# Altium PCB FPGA Board V1.PcbDoc (part 2 of 3)
Units mil, origin at the board's own origin, x right, y up, seen from the top; angles counter-clockwise.
Board outline 3460 x 2420 mil, 8 copper layers (Layer 1, Layer 2, Layer 3, Layer 4, Layer 5, Layer 6, Layer 7, Layer 8), stack 40.159 mil thick; 81 components, 311 nets, 1100 pads, 152 vias.
Unrouted connection lines stored in the file: 594.
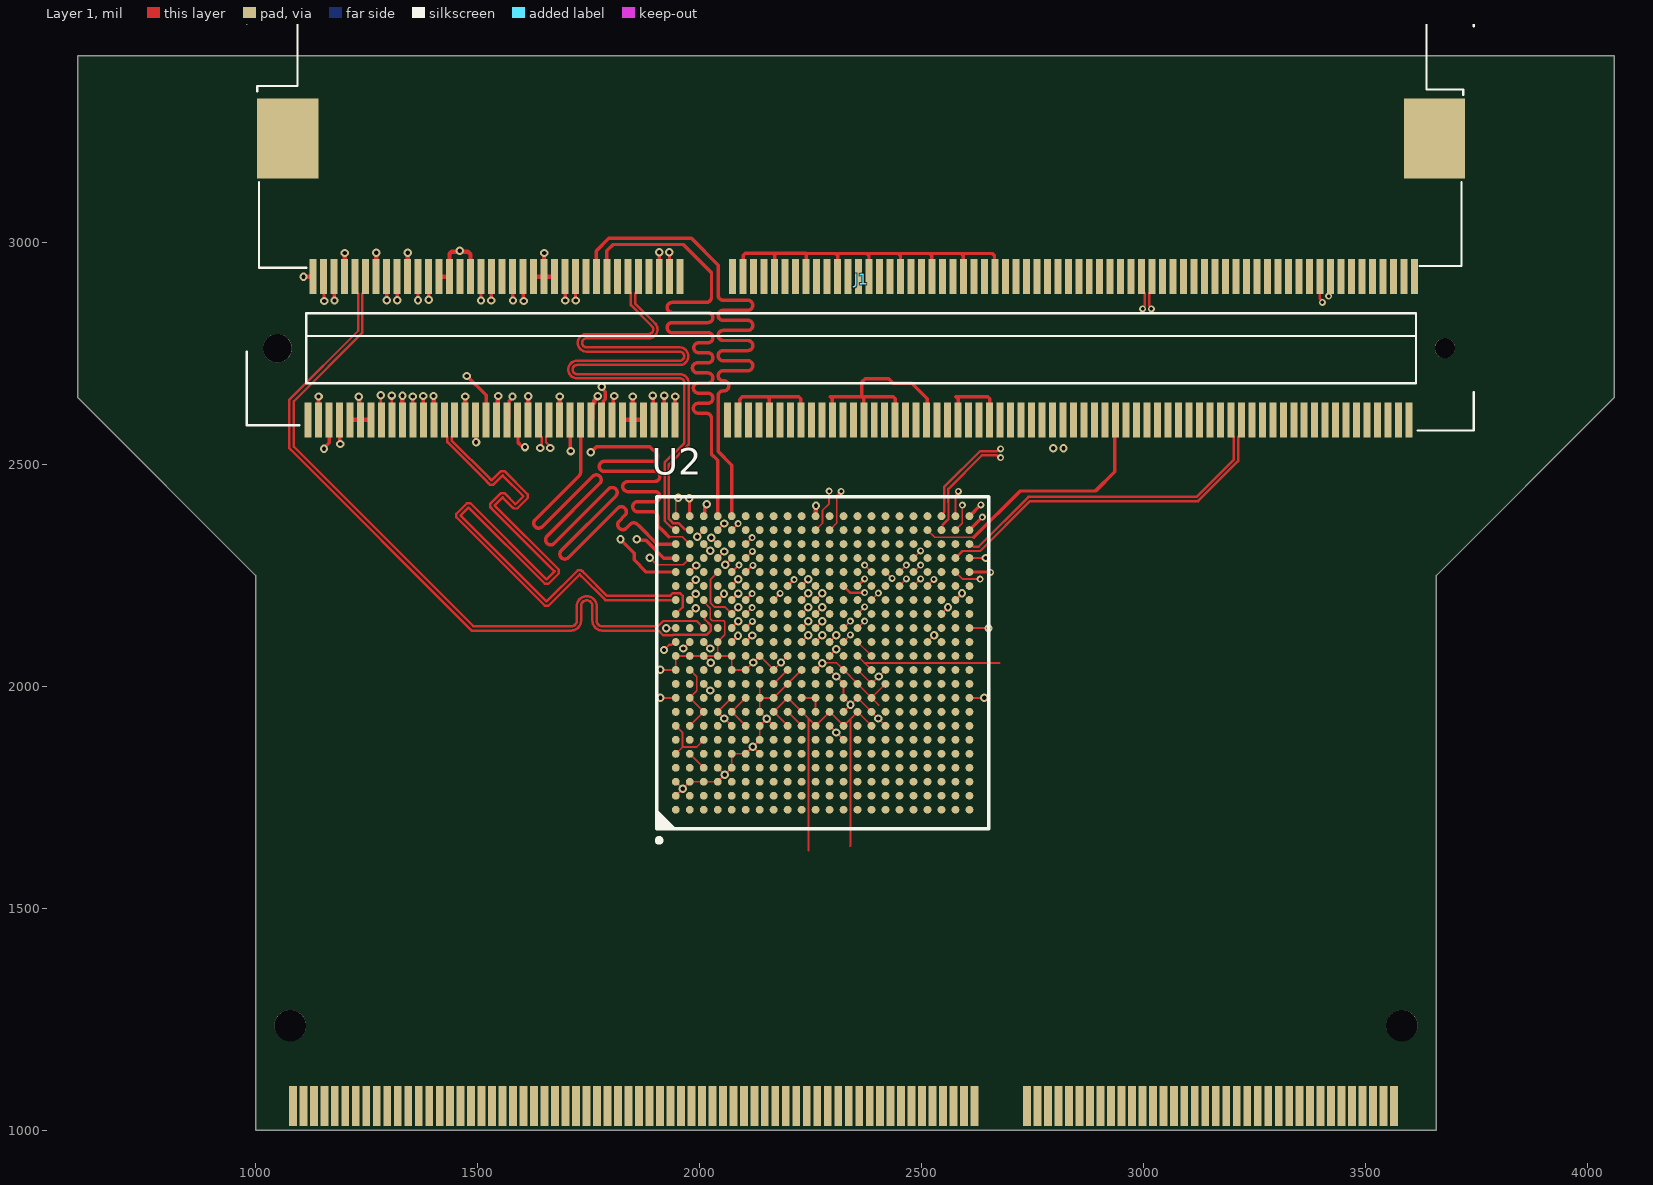
[diagram p0: Layer 1 view]

## Via types
v1: diameter 18.9, hole 9.84, Layer 1 to Layer 8, 113 vias
v2: diameter 15.75, hole 7.87, Layer 1 to Layer 8, 39 vias

## Nets (pads, with @x,y where several pads share a name; then routed paths per layer and width w, separated by ;. In a path a pad name is that pad's centre, name@x,y a point inside that pad or via, vN(x,y) a via of type N, cw(c..) or ccw(c..) an arc to the next point about the centre after c; other vN are vias at no path point) (continued)
DQ8: (continued)
  Layer 6 w4.92: v1(1354,2653) 1354,2484 1366.5,2471.5 1381.58,2456.43 ; 1381.57,2456.42 ccw(c1390.39,2465.24) 1399.2,2456.42 1408.65,2465.88 cw(c1417.46,2457.06) 1426.27,2465.88 cw(c1417.46,2457.06) 1426.27,2448.25 1413.63,2435.61 ccw(c1422.44,2426.8) 1413.63,2417.99 ccw(c1422.44,2426.8) 1431.25,2417.99 1443.89,2430.63 cw(c1452.71,2421.82) 1461.52,2430.63 cw(c1452.71,2421.82) 1461.52,2413.01 1448.88,2400.37 ccw(c1457.69,2391.55) 1448.88,2382.74 ccw(c1457.69,2391.55) 1466.5,2382.74 1479.14,2395.38 cw(c1487.95,2386.57) 1496.76,2395.38 cw(c1487.95,2386.57) 1496.76,2377.76 1484.12,2365.12 ccw(c1492.93,2356.31) 1484.12,2347.5 ccw(c1492.93,2356.31) 1501.74,2347.5 1517.13,2362.88 cw(c1525.94,2354.07) 1534.75,2362.88 cw(c1525.94,2354.07) 1534.75,2345.26 1519.37,2329.87 ccw(c1528.18,2321.06) 1519.37,2312.25 ccw(c1528.18,2321.06) 1536.99,2312.25 1553.25,2328.51 cw(c1562.06,2319.7) 1570.87,2328.51 cw(c1562.06,2319.7) 1570.87,2310.89 1554.61,2294.63 ccw(c1563.43,2285.82) 1554.61,2277 ccw(c1563.43,2285.82) 1572.24,2277 1588.5,2293.26 cw(c1597.31,2284.45) 1606.12,2293.26 cw(c1597.31,2284.45) 1606.12,2275.64 1589.86,2259.38 ccw(c1598.67,2250.57) 1589.86,2241.76 ccw(c1598.67,2250.57) 1607.48,2241.76 1623.74,2258.02 cw(c1632.55,2249.21) 1641.36,2258.02 cw(c1632.55,2249.21) 1641.36,2240.39 1625.11,2224.14 ccw(c1633.92,2215.32) 1625.11,2206.51 ccw(c1633.92,2215.32) 1642.73,2206.51 1658.99,2222.77 cw(c1667.8,2213.96) 1676.61,2222.77 cw(c1667.8,2213.96) 1676.61,2205.15 1670.73,2199.27 ccw(c1679.55,2190.46) 1679.55,2178 1697,2178 1989.29,2178 v1(1991.36,2175.93)
DQ9: J1.23 U2.B16 | length 1544.6
  Layer 1 w5: U2.B16@1978.06,2194.52 1978.06,2194.65 1991.44,2208.04 v1(1991.44,2208.17)
  Layer 1 w7.7: J1.23@1377.88,2600.17 J1.23@1377.88,2600.17 1377.94,2653.94 v1(1378,2654)
  Layer 6 w4.92: v1(1378,2654) 1378,2566.88 1378,2534 1381.91,2530.09 ccw(c1390.72,2538.9) 1399.53,2530.09 1444.67,2575.23 cw(c1453.48,2566.42) 1462.29,2575.23 cw(c1453.48,2566.42) 1462.29,2557.61 1412.31,2507.63 ccw(c1421.12,2498.81) 1412.31,2490 ccw(c1421.12,2498.81) 1429.93,2490 1461.39,2521.46 cw(c1470.2,2512.65) 1479.02,2521.46 cw(c1470.2,2512.65) 1479.02,2503.84 1447.55,2472.38 ccw(c1456.37,2463.57) 1447.55,2454.76 ccw(c1456.37,2463.57) 1465.18,2454.76 1492.09,2481.67 cw(c1500.9,2472.86) 1509.71,2481.67 cw(c1500.9,2472.86) 1509.71,2464.05 1482.8,2437.13 ccw(c1491.61,2428.32) 1482.8,2419.51 ccw(c1491.61,2428.32) 1500.42,2419.51 1527.34,2446.42 cw(c1536.15,2437.61) 1544.96,2446.42 cw(c1536.15,2437.61) 1544.96,2428.8 1518.05,2401.89 ccw(c1526.86,2393.08) 1518.05,2384.26 ccw(c1526.86,2393.08) 1535.67,2384.26 1562.58,2411.18 cw(c1571.39,2402.37) 1580.2,2411.18 cw(c1571.39,2402.37) 1580.2,2393.55 1558.14,2371.49 ccw(c1566.95,2362.68) 1558.14,2353.86 1577.5,2334.5 1723,2189 1972.27,2189 v1(1991.44,2208.17)

## Text inside footprints (layer, text, board x,y; h text height)
U1: Mechanical 7 "Default Padstyle: RX47p5Y11D0T" at 2505,1681 h50 r270; Mechanical 7 "Pin One Padstyle: RX47p5Y11D0T" at 2445,1681 h50 r270; Mechanical 7 "Alt 1 Padstyle: OX60Y90D30P" at 2265,1718.5 h50 r270; Mechanical 7 "Alt 2 Padstyle: OX90Y60D30P" at 2205,1718.5 h50 r270; Mechanical 7 "0.728in/18.491mm" at 3276,1956 h25 r270; Mechanical 7 "0.795in/20.193mm" at 3351,1956 h25 r270; Mechanical 7 "0.476in/12.09mm" at 2930.5,2540 h25 r270; Mechanical 7 "0.02in/0.5mm" at 3147.04,1398.25 h25 r270; Mechanical 7 "0.028in/0.711mm" at 2585,1578.75 h25 r270; Bottom Overlay "*" at 3175.38,1645.75 h50 r270; Mechanical 13 "*" at 3128,1694.5 h50 r270